# Altium PCB Expand Module.PcbDoc
Units mil, origin at the board's own origin, x right, y up, seen from the top; angles counter-clockwise.
Board outline 6000 x 4000 mil, 2 copper layers (Top Layer, Bottom Layer); 16 components, 40 nets, 84 pads, 0 vias.
Unrouted connection lines stored in the file: 9.
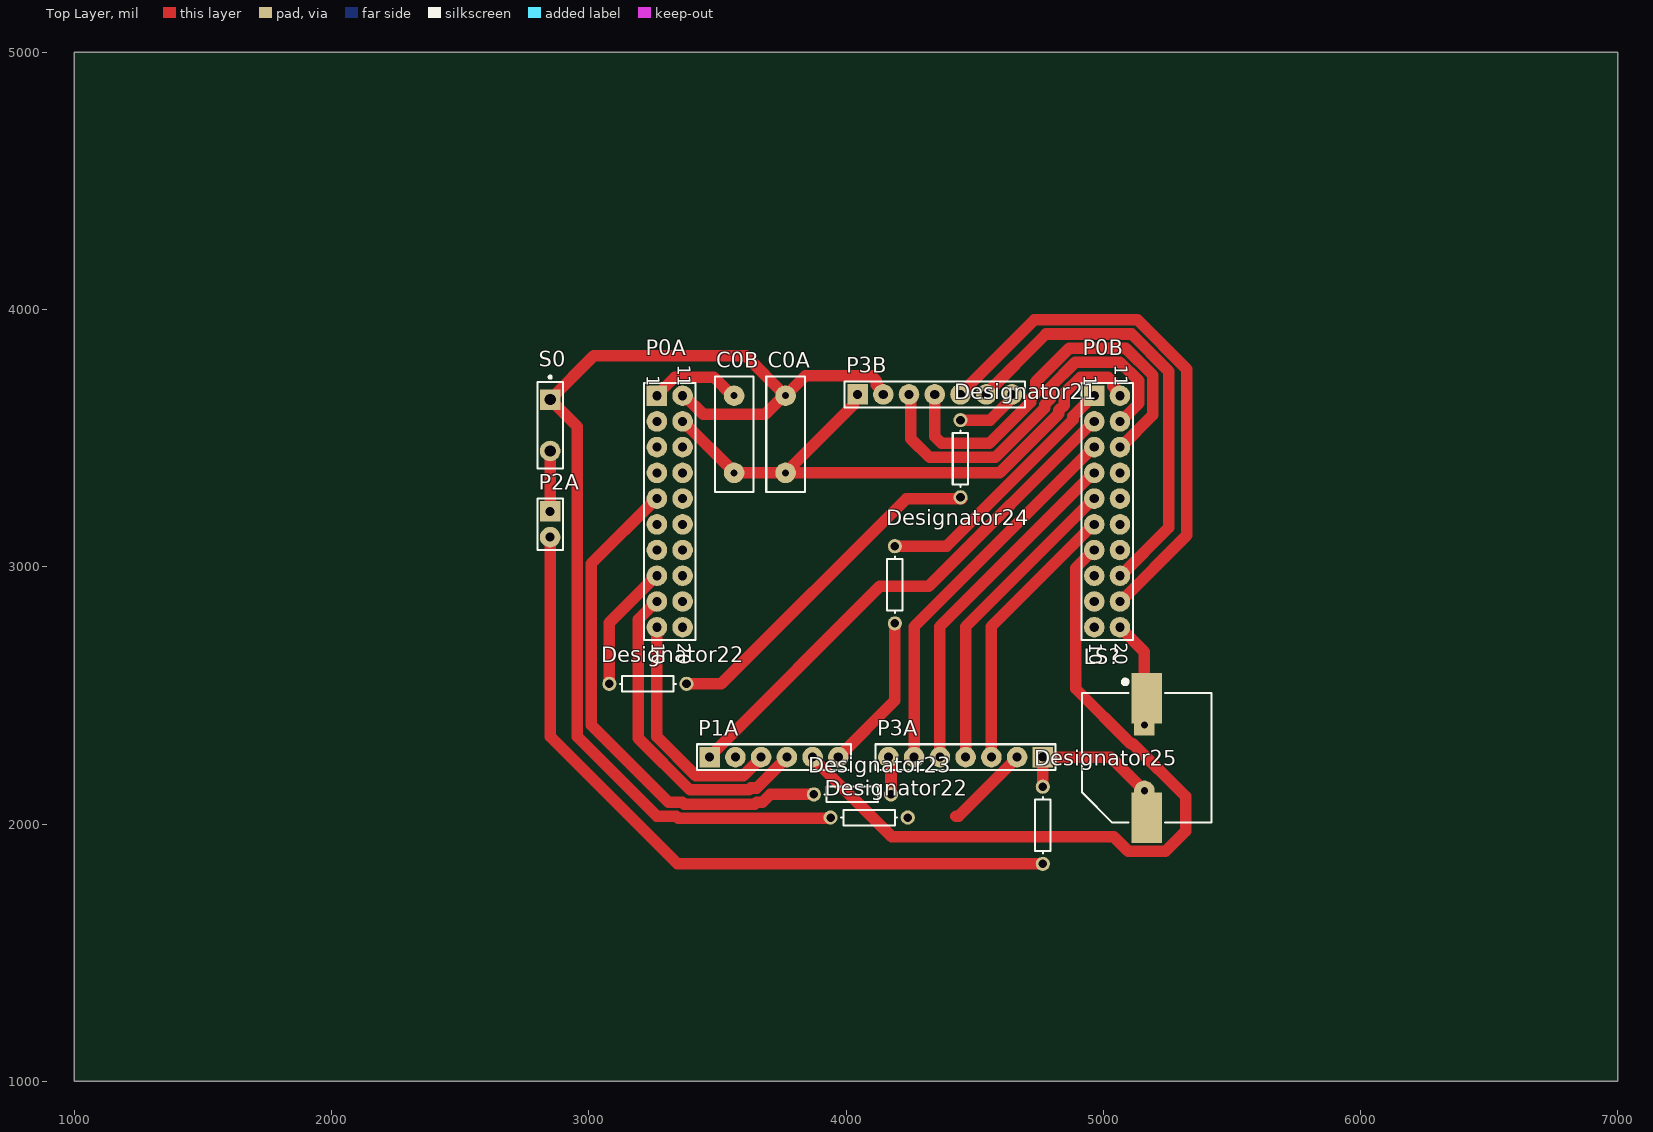
[diagram p0: Top Layer view]
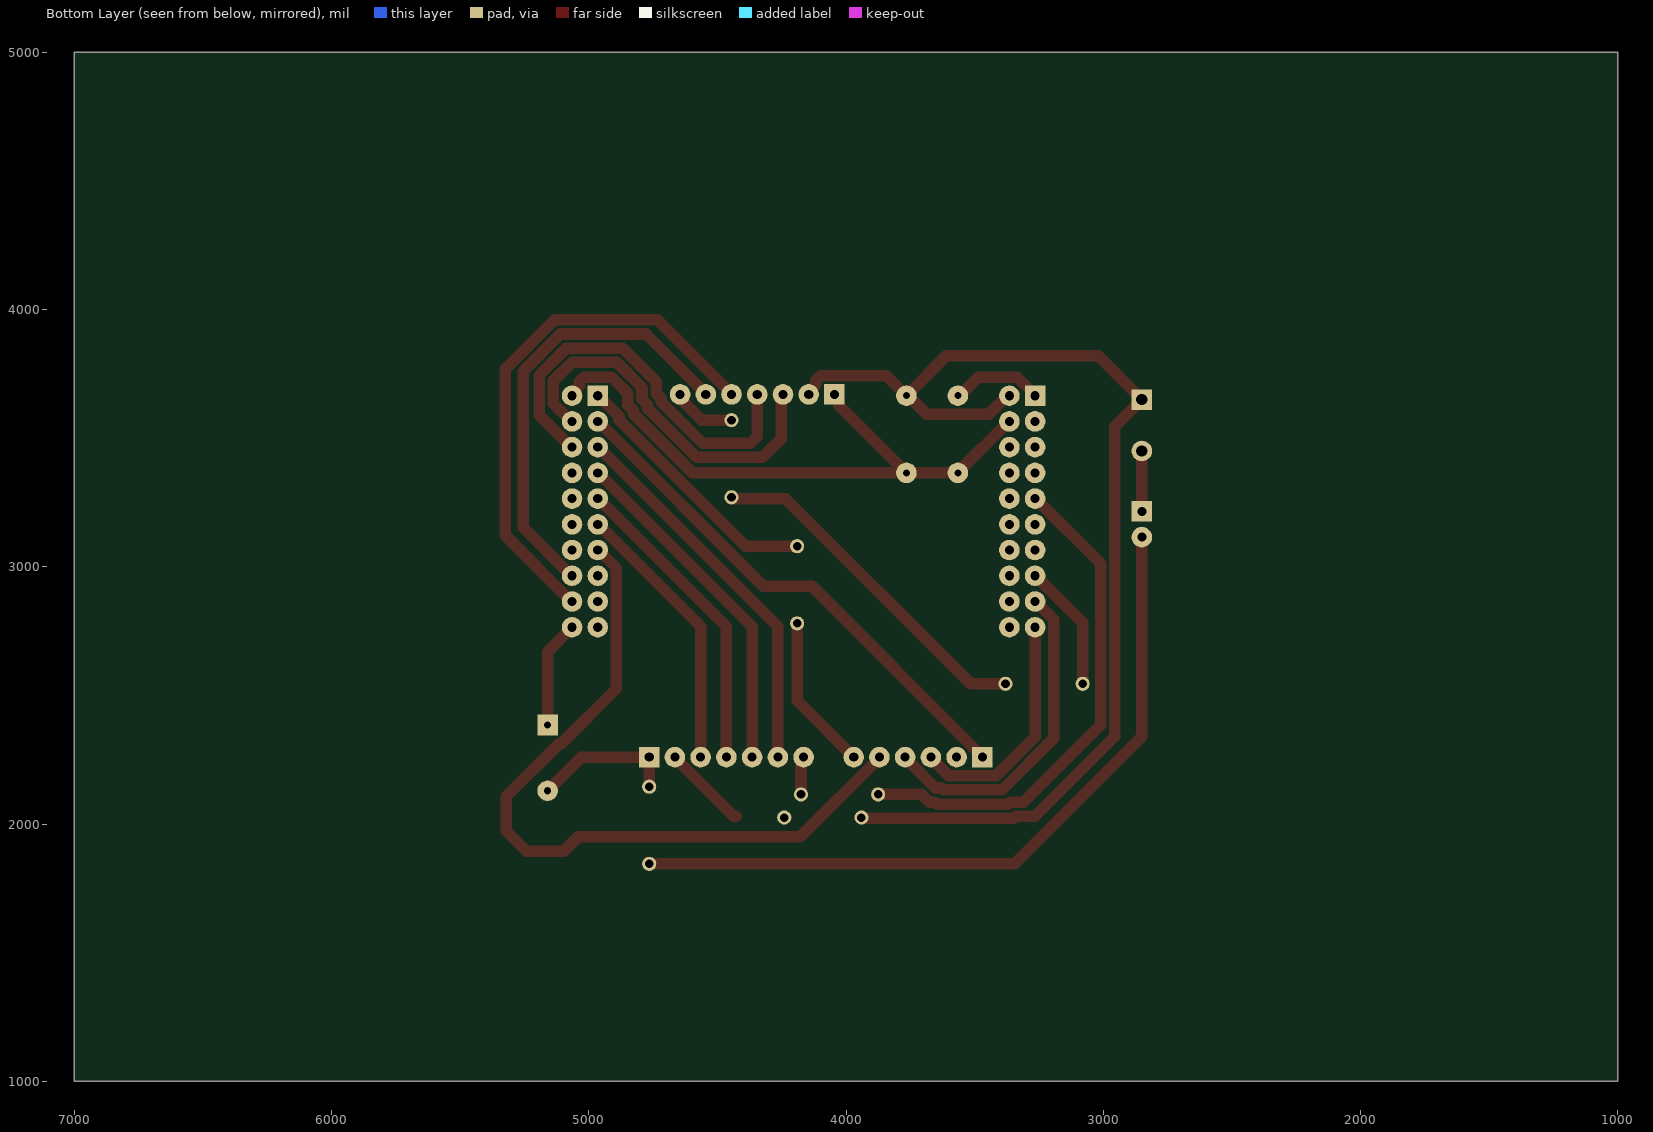
[diagram p1: Bottom Layer view, seen from below]

## Layer stack, top to bottom
Top Solder: solder mask 0.4, Solder Resist, Dk 3.5
Top Layer: signal copper 1.4
Dielectric 1: dielectric 12.6, FR-4, Dk 4.8
Bottom Layer: signal copper 1.4
Bottom Solder: solder mask 0.4, Solder Resist, Dk 3.5

## Board outline
1000,1000 7000,1000 7000,5000 1000,5000

## Design rules (kind name [scope] priority, off if disabled: settings)
Clearance [All] p1: gap=10 ignorepadtopadclearanceinfootprint=FALSE except(0: Arc-Hole Track-Hole SMDPad-Hole THPad-Hole Via-Hole Fill-Hole Poly-Hole Region-Hole Text-Hole)
PolygonConnect [All] p1: connectstyle=Relief reliefconductorwidth=10 reliefentries=4 polygonreliefangle="90 Angle" airgapwidth=10
RoutingVias [All] p1: holewidth=28 width=50 viastyle="Through Hole" minholewidth=28 minwidth=50 maxholewidth=28 maxwidth=50
SolderMaskExpansion [All] p1: expansion=4 istentingtop=FALSE
Width [All] p1: maxlimit=50 minlimit=40 preferedwidth=45
30 further rules are at their usual default settings.

## Components (designator, comment, footprint, x,y, rotation, side; value= is the part's Value field where it differs from the comment)
C0A "Cap" RAD-0.3 3765,3515 r270 top value=100nF
C0B "Cap" RAD-0.3 3565,3515 r270 top value=100nF
Designator21 "Comment" AXIAL-0.3 4445,3420 r90 top
Designator22 "Comment" AXIAL-0.3 4090,2025 r0 top
Designator22 "Comment" AXIAL-0.3 3230,2545 r180 top
Designator23 "Comment" AXIAL-0.3 4025,2115 r180 top
Designator24 "Comment" AXIAL-0.3 4190,2930 r90 top
Designator25 "Comment" AXIAL-0.3 4765,1995 r90 top
LS? "Buzzer" ABSM-1574 5169.45,2489.33 r270 top
P0A "Header 10X2A" HDR2X10_CEN 3265,3665 r270 top
P0B "Header 10X2A" HDR2X10_CEN 4965,3665 r270 top
P1A "Header 6" HDR1X6 3470,2260 r0 top
P2A "Header 2" HDR1X2 2850,3215 r270 top
P3A "Header 7" HDR1X7 4765,2260 r180 top
P3B "Header 7" HDR1X7 4045,3670 r0 top
S0 "SW-SPST" SPST-2 2850,3550 r270 top

## Footprints (in the part's own frame and the unit in brackets; to place one, negate y for a bottom-side part, rotate by r counter-clockwise, add the part's x,y. Pads: shape width x height; smd on the part's side, far side on the other; paste and mask are expansions set on the pad)
ABSM-1574 [mm] "Magnetic Transducer Buzzer"
  rect 5x3 smd: 1(0,0) 2(11.8,0)
  rect 2.032x2.032 hole 0.7: 1A(2.65,-0.24)
  round 2.032 hole 0.7: 2A(9.15,-0.24)
  silkscreen extent -1.83,-6.4 12.3,6.4
AXIAL-0.3 [mm] "Axial Device, Thru-Hole; 2 Leads; 0.3 in Pin Spacing"
  round 1.4 hole 0.85: 1(-3.81,0) 2(3.81,0)
  silkscreen extent -2.77,-0.76 2.77,0.76
HDR1X2 [mil] "Connector; Header; 2 Position"
  rect 80x80 hole 35.43: 1(0,0)
  round 80 hole 35.43: 2(100,0)
  silkscreen extent -50,-50 150,50
HDR1X6 [mil] "Connector; Header; 6 Position"
  rect 80x80 hole 35.43: 1(0,0)
  round 80 hole 35.43: 2(100,0) 3(200,0) 4(300,0) 5(400,0) 6(500,0)
  silkscreen extent -50,-50 550,50
HDR1X7 [mil] "Connector; Header; 7 Position"
  rect 80x80 hole 35.43: 1(0,0)
  round 80 hole 35.43: 2(100,0) 3(200,0) 4(300,0) 5(400,0) 6(500,0) 7(600,0)
  silkscreen extent -50,-50 650,50
HDR2X10_CEN [mil] "Connector; Header; 10x2 Position"
  rect 80x80 hole 35.43: 1(0,0)
  round 80 hole 35.43: 2(100,0) 3(200,0) 4(300,0) 5(400,0) 6(500,0) 7(600,0) 8(700,0) 9(800,0) 10(900,0) 11(0,100) 12(100,100) 13(200,100) 14(300,100) 15(400,100) 16(500,100) 17(600,100) 18(700,100) 19(800,100) 20(900,100)
  silkscreen extent -50,-50 950,150
RAD-0.3 [mil] "Radial Cap, Thru-Hole; 2 Leads; 0.3 in Pin Spacing"
  round 80 hole 27.56: 1(-150,0) 2(150,0)
  silkscreen extent -225,-75 225,75
SPST-2 [mil] "Switch; 2 Leads"
  rect 80x80 hole 43.31: 1(-100,0)
  round 80 hole 43.31: 2(100,0)
  silkscreen extent -192,-50 169,50

## Part data
C0A C0B: "Capacitor", LatestRevisionDate=17-Jul-2002, LatestRevisionNote="Re-released for DXP Platform.", PackageDescription="Radial Cap, Thru-Hole; 2 Leads; 0.3 in Pin Spacing", PackageReference=RAD-0.3, Published=8-Jun-2000, Publisher="Altium Limited"
LS?: "Magnetic Transducer Buzzer", ComponentLink1Description="Manufacturer Link", ComponentLink1URL=http://www.megastar.com/linecard/buzzmode/index.php, DatasheetVersion=17-Dec-2003, LatestRevisionDate=17-Dec-2003, LatestRevisionNote="Schematic revised, PCB Footprint replaced.", PackageDescription="Magnetic Transducer Buzzer", PackageReference=ABSM-1574, Published=24-Mar-1999, Publisher="Altium Limited"
P0A P0B: "Header, 10-Pin, Dual row", LatestRevisionDate=17-Jul-2002, LatestRevisionNote="Re-released for DXP Platform.", Publisher="Altium Limited"
P1A: "Header, 6-Pin", LatestRevisionDate=17-Jul-2002, LatestRevisionNote="Re-released for DXP Platform.", Publisher="Altium Limited"
P2A: "Header, 2-Pin", LatestRevisionDate=17-Jul-2002, LatestRevisionNote="Re-released for DXP Platform.", Publisher="Altium Limited"
P3A P3B: "Header, 7-Pin", LatestRevisionDate=17-Jul-2002, LatestRevisionNote="Re-released for DXP Platform.", Publisher="Altium Limited"
S0: "Single-Pole, Single-Throw Switch", LatestRevisionDate=17-Jul-2002, LatestRevisionNote="Re-released for DXP Platform.", PackageDescription="Switch; 2 Leads", PackageReference=SPST-2, Published=24-Mar-1999, Publisher="Altium Limited"

## Nets (pads, with @x,y where several pads share a name; then routed paths per layer and width w, separated by ;. In a path a pad name is that pad's centre, name@x,y a point inside that pad or via, vN(x,y) a via of type N, cw(c..) or ccw(c..) an arc to the next point about the centre after c; other vN are vias at no path point)
3V3: C0B.1 P0A.1 | length 361.5
  Top Layer w45: P0A.1 3282.5,3682.5 3282.5,3685.03 3334.97,3737.5 3485.47,3737.5 3557.97,3665 C0B.1
+5: C0A.1 Designator22.1@3940,2025 Designator22.2@4240,2025 P0A.11 P3A.2 P3B.2 S0.1 | length 4771.2
  Top Layer w45: P0A.11 3372.03,3665 3444.53,3592.5 3685.47,3592.5 3757.97,3665 C0A.1 ; Designator22.1@3940,2022.5 3348.19,2022.5 3340.69,2030 3265,2030 2955,2340 2955,3545 S0.1 3020,3820 3610,3820 C0A.1 ; P3B.2 4145,3679.47 4117.5,3706.97 4117.5,3723.46 4098.46,3742.5 3842.5,3742.5 C0A.1 ; 4427.53,2030 4437.53,2030 4665,2257.47 P3A.2
GND: C0A.2 C0B.2 Designator25.1 Designator25.2 LS?.2 LS?.2A P0A.12 P0B.11 P2A.2 P3A.1 P3B.1 | length 5898.7
  Top Layer w45: P2A.2 2850,2732.76 2850,2340 3345,1845 Designator25.1 ; P0A.12 3367.53,3565 3565,3367.53 C0B.2 C0A.2 ; P3B.1 4027.5,3652.5 4027.5,3627.5 C0A.2 ; Designator25.2 P3A.1 5029.09,2260 LS?.2A ; P0B.11 5065,3674.47 5037.5,3701.97 5037.5,3718.46 5018.46,3737.5 4911.54,3737.5 4848,3673.96 4848,3628.31 4827.5,3607.81 4827.5,3594.41 4598.09,3365 C0A.2
NetLS?_1: LS?.1 LS?.1A P0B.20 | length 419.4
  Top Layer w45: P0B.20 5160,2670 LS?.1A
NetP0A_2: P0A.2
NetP0A_3: P0A.3
NetP0A_4: P0A.4
NetP0A_5: Designator23.1 Designator23.2 P0A.5 P3A.7 | length 2144.2
  Top Layer w45: P0A.5 3262.47,3265 3010,3012.53 3010,2385 3310,2085 3363.47,2085 3370.97,2077.5 3645.59,2077.5 3653.09,2085 3675.31,2085 3705.31,2115 Designator23.2 ; P3A.7 4165,2250.53 4175,2240.53 Designator23.1
NetP0A_6: P0A.6
NetP0A_7: P0A.7
NetP0A_8: Designator21.1 Designator21.2 Designator22.1@3380,2545 Designator22.2@3080,2545 P0A.8 P3B.7 | length 2119.1
  Top Layer w45: Designator22.2@3080,2545 3080,2782.53 3262.47,2965 P0A.8 ; Designator22.1@3380,2545 3515,2545 4235,3265 Designator21.1@4450,3265 ; Designator21.2 4560,3570 4638.3,3648.3 4638.3,3663.3 P3B.7 P3B.7@4645,3667.47
NetP0A_9: P0A.9 P1A.4 | length 1277.9
  Top Layer w45: P0A.9 3262.47,2865 3192.5,2795.03 3192.5,2333.76 3393.76,2132.5 3622.81,2132.5 3630.31,2140 3652.53,2140 3770,2257.47 P1A.4
NetP0A_10: P0A.10 P1A.3 | length 925.2
  Top Layer w45: P0A.10 3265,2339.04 3416.54,2187.5 3600.03,2187.5 3670,2257.47 P1A.3
NetP0A_13: P0A.13
NetP0A_14: P0A.14
NetP0A_15: P0A.15
NetP0A_16: P0A.16
NetP0A_17: P0A.17
NetP0A_18: P0A.18
NetP0A_19: P0A.19
NetP0A_20: P0A.20
NetP0B_1: Designator24.1 Designator24.2 P0B.1 P1A.6 | length 1636.3
  Top Layer w45: P1A.6 4190,2480 Designator24.1 ; Designator24.2 4390.88,3080 4882.5,3571.62 4882.5,3585.03 4944.97,3647.5 4947.5,3647.5 P0B.1
NetP0B_2: P0B.2 P1A.1 | length 2037
  Top Layer w45: P1A.1 3487.5,2277.5 3487.5,2280.03 4131.64,2924.17 4321.64,2924.17 4962.47,3565 P0B.2
NetP0B_3: P0B.3 P3A.6 | length 1496.4
  Top Layer w45: P3A.6 4265,2767.53 4962.47,3465 P0B.3
NetP0B_4: P0B.4 P3A.5 | length 1355
  Top Layer w45: P3A.5 4365,2767.53 4962.47,3365 P0B.4
NetP0B_5: P0B.5 P3A.4 | length 1213.6
  Top Layer w45: P3A.4 4465,2767.53 4962.47,3265 P0B.5
NetP0B_6: P0B.6 P3A.3 | length 1072.2
  Top Layer w45: P3A.3 4565,2767.53 4962.47,3165 P0B.6
NetP0B_7: P0B.7 P1A.5 | length 2942.3
  Top Layer w45: P1A.5 3870,2257.47 4177.47,1950 5040.77,1950 5096.93,1893.84 5241.97,1893.84 5320,1971.87 5320,2107.78 5115.28,2312.5 5106.54,2312.5 4892.5,2526.54 4892.5,2995.03 4962.47,3065 P0B.7
NetP0B_8: P0B.8 P1A.2 | length 2.5
  Top Layer w45: P1A.2 P1A.2@3570,2262.53
NetP0B_9: P0B.9
NetP0B_10: P0B.10
NetP0B_12: P0B.12 P3B.3 | length 1497.5
  Top Layer w45: P3B.3 4251.7,3663.3 4251.7,3498.3 4325,3425 4580.31,3425 4772.5,3617.19 4772.5,3630.59 4793,3651.1 4793,3696.75 4891.26,3795 5065,3795 5137.5,3722.5 5137.5,3634.97 5067.53,3565 P0B.12
NetP0B_13: P0B.13 P3B.4 | length 1587.9
  Top Layer w45: P3B.4 4345,3506.36 4371.36,3480 4557.53,3480 4717.5,3639.97 4717.5,3653.38 4738,3673.88 4738,3719.53 4868.47,3850 5087.78,3850 5192.5,3745.28 5192.5,3589.97 5067.53,3465 P0B.13
NetP0B_14: P0B.14
NetP0B_15: P0B.15
NetP0B_16: P0B.16
NetP0B_17: P0B.17
NetP0B_18: P0B.18 P3B.6 | length 1744.4
  Top Layer w45: P3B.6 4545,3672.53 4777.47,3905 5110.56,3905 5255,3760.56 5255,3152.47 5067.53,2965 P0B.18
NetP0B_19: P0B.19 P3B.5 | length 2093.5
  Top Layer w45: P3B.5 4445,3672.53 4732.47,3960 5133.35,3960 5325,3768.35 5325,3122.47 5067.53,2865 P0B.19
NetP2A_1: P2A.1 S0.2 | length 235
  Top Layer w45: P2A.1 S0.2

## Text inside footprints (layer, text, board x,y; h text height)
P0A: Top Overlay "20" at 3345,2705 h50 r270; Top Overlay "10" at 3245,2705 h50 r270; Top Overlay "1" at 3345,3745 h50 r270; Top Overlay "1" at 3345,3785 h50 r270; Top Overlay "1" at 3225,3745 h50 r270
P0B: Top Overlay "20" at 5045,2705 h50 r270; Top Overlay "10" at 4945,2705 h50 r270; Top Overlay "1" at 5045,3745 h50 r270; Top Overlay "1" at 5045,3785 h50 r270; Top Overlay "1" at 4925,3745 h50 r270